# EAGLE board DAU_Kupplung_3phasig_Basisstation_V1_1 (EAGLE 6.1)
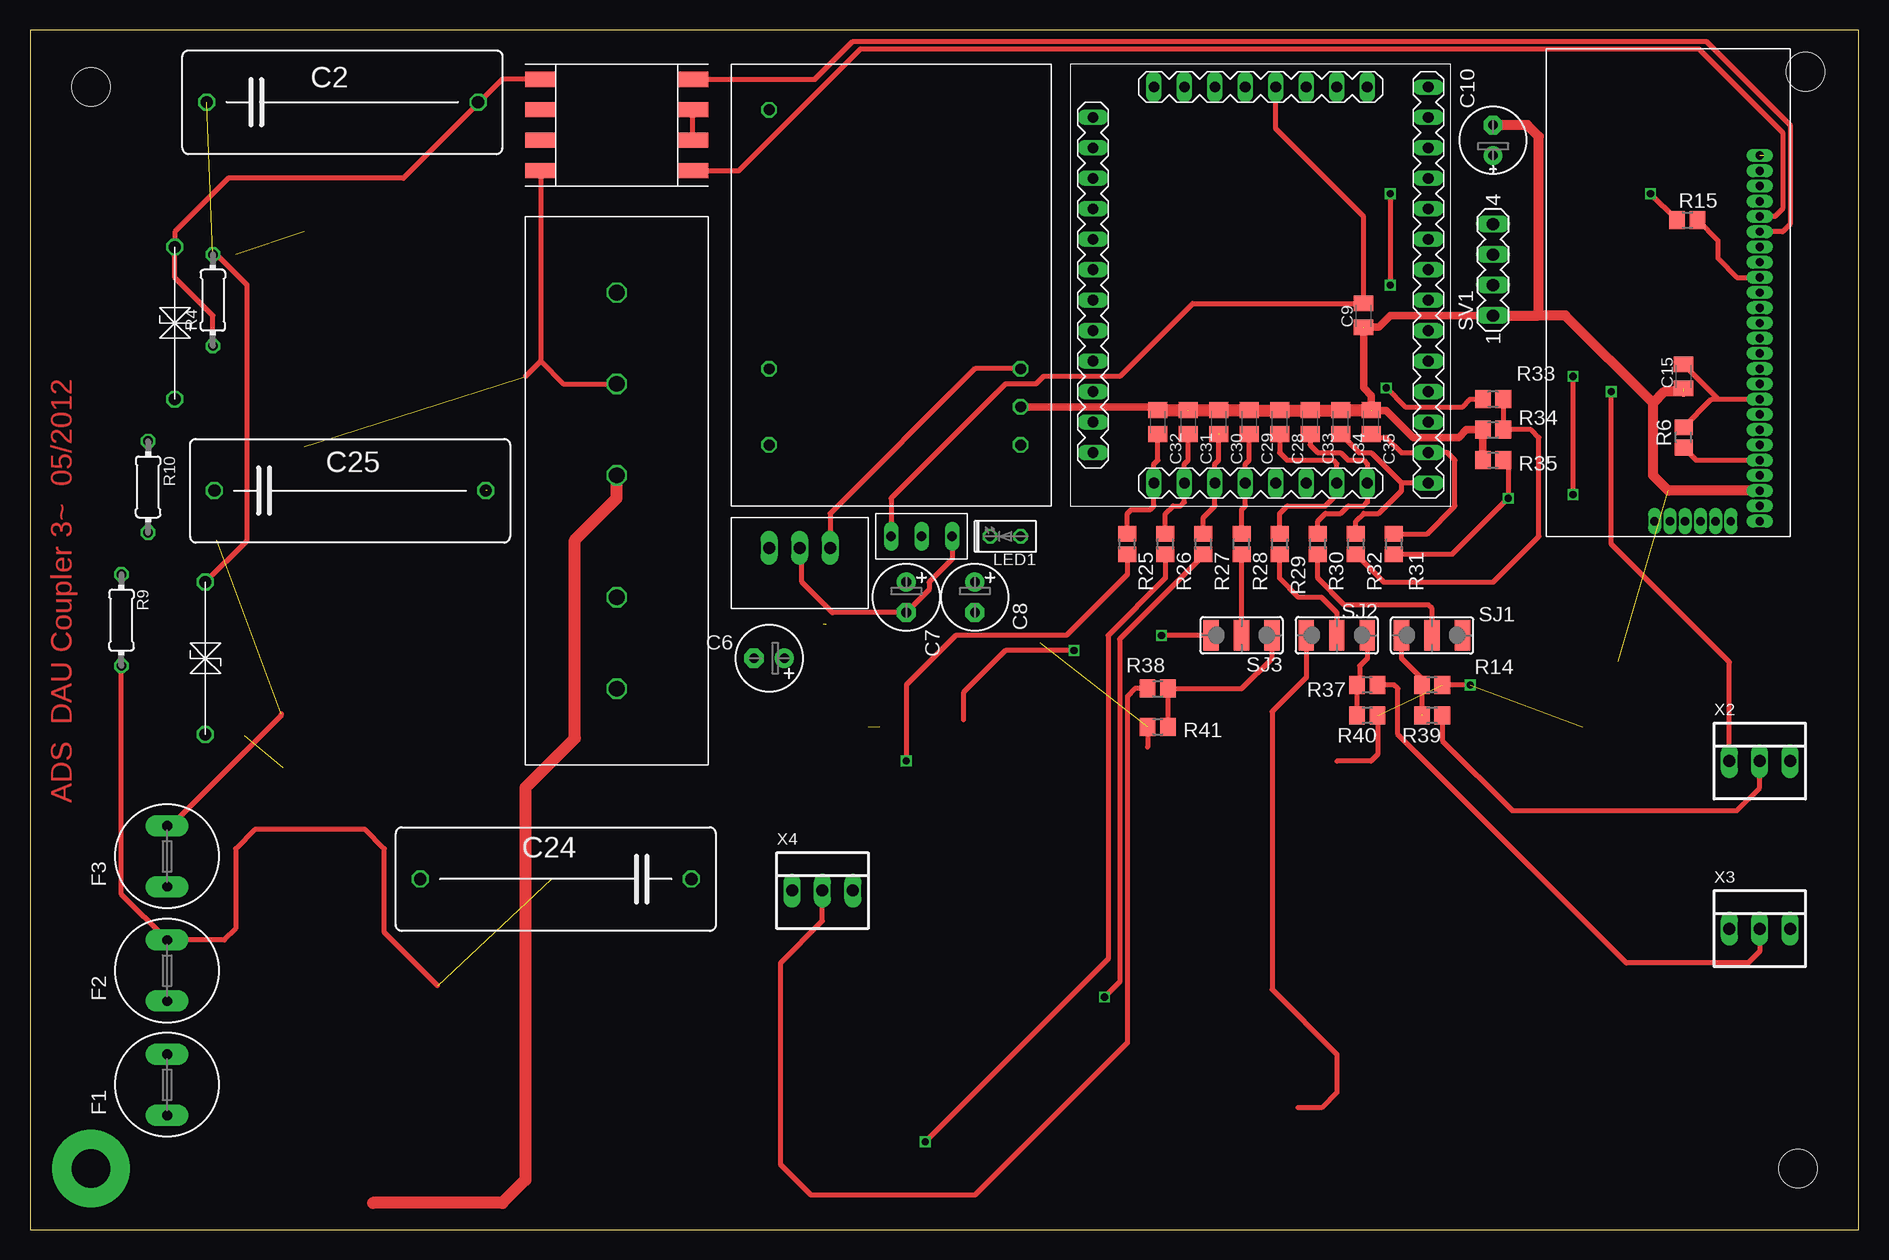
[diagram p0: board, top side]
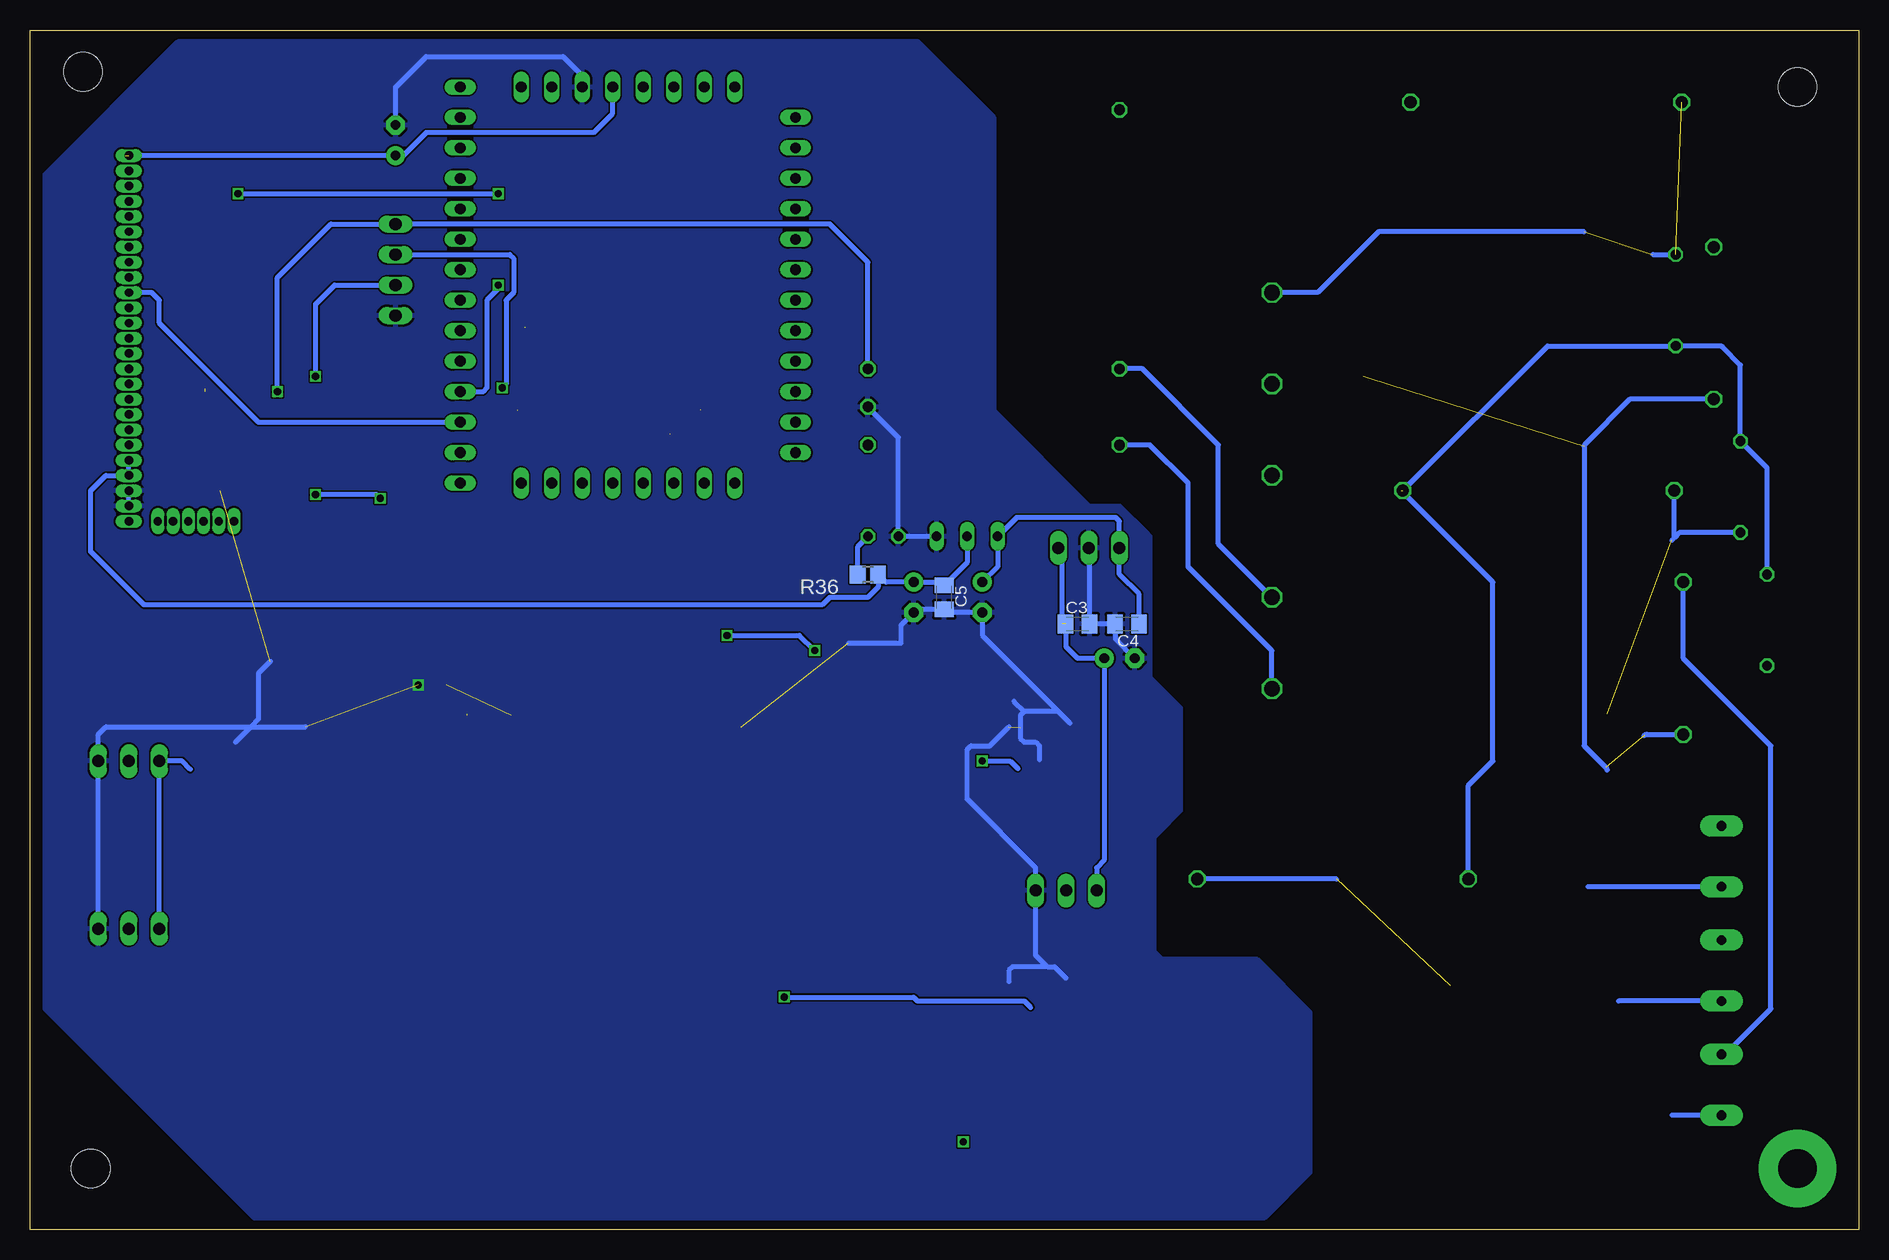
[diagram p1: board, bottom side, seen from below]

Size 152.38 x 100 mm. Coordinates in mm from the lower left corner, seen from the top.
Outline: 0,0 152.38,0 152.38,100 0,100 0,0
Copper layers (1*16): Top 0.035mm / dielectric 1.5mm / Bottom 0.035mm
Design rules: minimum track width 0.15mm, minimum drill 0.3mm, track to track 0.15mm, track to pad 0.15mm, pad to pad 0.15mm, via to via 0.15mm, smd to smd 0.15mm, copper to edge 0.3mm, drill to drill 0.2mm, minimum pad ring 0.2mm, minimum via ring 0.15mm, stop-mask expansion 0.075mm, vias tented up to drill 0mil, thermal gap 0.2mm
Holes 3.2 mm at 147.96,96.52 147.32,5.08 5.08,95.25

## Footprints (pad centres in the part's own frame; a part is rotated, then mirrored left to right if it is on the bottom)
C225-087X268 = drill 1.016 octagon: 1 -11.303,0; 2 11.303,0
C0805K = smd 1.3 x 1.6: 1 -1,0; 2 1,0
E2,5-6 = drill 0.813 pad 1.6: + -1.27,0 | drill 0.813 pad 1.6 octagon: - 1.27,0
E2,5-6E = drill 0.813 pad 1.575: + -1.27,0 | drill 0.813 pad 1.575 octagon: - 1.27,0
TR5 = drill 0.813 pad 1.778 long: 1 -2.54,0; 2 2.54,0
LED2X5 = drill 0.813 octagon: A -1.27,0; K 1.27,0
TSV = drill 1 octagon: P$1 -5.08,0; P$2 7.62,0
0204/7 = drill 0.813 octagon: 1 -3.81,0; 2 3.81,0
R0805 = smd 1.3 x 1.5: 1 -0.85,0; 2 0.85,0
SJ_2W = smd 1.27 x 2.54: 1 -2.54,0; 2 0,0; 3 2.54,0
MA04-1 = drill 1.016 long: 1 -3.81,0; 2 -1.27,0; 3 1.27,0; 4 3.81,0
RAC04_12SA = drill 0.9 octagon: +VO 25.4,24.13; GND 28.575,24.13; L 31.75,3.175; N 25.4,3.175; NC 3.81,3.175; NC1 31.75,24.13
ADUC_MINIMUM = drill 0.9 long: ADC0 -9.207,-16.51; ADC1 -6.668,-16.51; ADC2 -4.128,-16.51; ADC3 -1.587,-16.51; ADC4 6.032,-16.51; ADC5 8.572,-16.51; ADC6 13.652,-16.51; ADC7 13.652,-13.97; ALE -14.287,6.35; DAC0 0.953,-16.51; DAC1 3.493,-16.51; GND 3.493,16.51; GND2 -4.128,16.51; GND3 -6.668,16.51; INT0 13.652,-6.35; MISO 13.652,-3.81; MOSI 13.652,11.43; P00 -14.287,3.81; P01 -14.287,1.27; P02 -14.287,-1.27; P03 -14.287,-3.81; P04 -14.287,-6.35; P05 -14.287,-8.89; P06 -14.287,-11.43; P07 -14.287,-13.97; P20 13.652,13.97; P21 13.652,16.51; P22 8.572,16.51; P23 6.032,16.51; P24 -9.207,16.51; P25 -14.287,13.97; P34 13.652,-1.27; P35 13.652,1.27; P36 13.652,3.81; P37 13.652,6.35; PWM0 -14.287,11.43; PWM1 -14.287,8.89; RXD 13.652,-11.43; SCLOCK 13.652,8.89; TXD 13.652,-8.89; VCC 0.953,16.51; VCC1 -1.587,16.51
MODEM_FUSS = drill 0.7 pad 0.813 long: P$1 -20.32,-8.89; P$2 -19.05,-8.89; P$3 -17.78,-8.89; P$4 -16.51,-8.89; P$5 -15.24,-8.89; P$6 -13.97,-8.89; P$7 -12.7,-8.89; P$8 -11.43,-8.89; P$9 -10.16,-8.89; P$10 -8.89,-8.89; P$11 -7.62,-8.89; P$12 -6.35,-8.89; P$13 -5.08,-8.89; P$14 -3.81,-8.89; P$15 -2.54,-8.89; P$16 -1.27,-8.89; P$17 0,-8.89; P$18 1.27,-8.89; P$19 2.54,-8.89; P$20 3.81,-8.89; P$21 5.08,-8.89; P$22 6.35,-8.89; P$23 7.62,-8.89; P$24 8.89,-8.89; P$25 10.16,-8.89; P$29 -20.32,-3.937; P$30 -20.32,-5.207; P$31 -20.32,-6.477 | drill 0.7 pad 0.61 long: P$26 -20.32,-0.127; P$27 -20.32,-1.397; P$28 -20.32,-2.667
PLC-UEBERTRAGER_V2 = smd 2.54 x 1.27: 1LINE1 6.35,3.81; 2 6.35,1.27; 3 6.35,-1.27; 4LINE2 6.35,-3.81; 6NC -6.35,1.27; 7NC -6.35,-1.27; 8N -6.35,-3.81; L5 -6.35,3.81
RECOM785X = drill 1 long: GND 0,2.54; VIN -2.54,2.54; VOUT 2.54,2.54
TS1084_HOCH = drill 0.8 long: GND 0,0; IN 5.08,0; OUT 2.54,0
NETZFILTER = drill 1.3 octagon: L 6.35,7.62; L' 39.37,7.62; N 13.97,7.62; N' 31.75,7.62; PE 21.59,7.62
22-23-2031 = drill 1 long: 1 -2.54,0; 2 0,0; 3 2.54,0

## Placement (x,y rotation side)
C2  470n/270V  [C225-087X268]  26.04,93.98 0 top
C3  100n  [C0805K]  65.09,50.48 0 bottom
C4  100n  [C0805K]  60.96,50.48 180 bottom
C5  100n  [C0805K]  76.2,52.7 270 bottom
C6  4,7µ  [E2,5-6]  61.59,47.62 180 top
C7  4,7µ  [E2,5-6]  73.03,52.7 270 top
C8  4,7µ  [E2,5-6]  78.74,52.7 270 top
C9  100n  [C0805K]  111.12,76.2 90 top
C10  4µ7  [E2,5-6E]  121.92,90.81 90 top
C15  1µ  [C0805K]  137.79,71.12 90 top
C24  470n/270V  [C225-087X268]  43.81,29.21 180 top
C25  470n/270V  [C225-087X268]  26.67,61.59 0 top
C28  100n  [C0805K]  104.14,67.31 90 top
C29  100n  [C0805K]  101.6,67.31 90 top
C30  100n  [C0805K]  99.06,67.31 90 top
C31  100n  [C0805K]  96.52,67.31 90 top
C32  100n  [C0805K]  93.98,67.31 90 top
C33  100n  [C0805K]  106.68,67.31 90 top
C34  100n  [C0805K]  109.22,67.31 90 top
C35  100n  [C0805K]  111.76,67.31 90 top
F1  T250mA/240V  [TR5]  11.43,12.06 90 top
F2  T250mA/240V  [TR5]  11.43,21.59 90 top
F3  T250mA/240V  [TR5]  11.43,31.11 90 top
LED1  [LED2X5]  81.28,57.78 180 top
P6KE300CA  P6KE300CA  [TSV]  14.61,48.9 270 top
R4  470k  [0204/7]  15.24,77.47 90 top
R6  1M  [R0805]  137.79,66.04 90 top
R9  470k  [0204/7]  7.62,50.8 270 top
R10  470k  [0204/7]  9.84,61.91 270 top
R14  220R/33k  [R0805]  116.84,45.4 180 top
R15  330R  [R0805]  138.11,84.14 0 top
R25  10R  [R0805]  91.44,57.15 90 top
R26  10R  [R0805]  94.61,57.15 90 top
R27  10R  [R0805]  97.79,57.15 90 top
R28  10R  [R0805]  100.97,57.15 90 top
R29  10R  [R0805]  104.14,57.15 90 top
R30  10R  [R0805]  107.31,57.15 90 top
R31  10R  [R0805]  113.67,57.15 90 top
R32  10R  [R0805]  110.49,57.15 90 top
R33  680k  [R0805]  121.92,69.22 180 top
R34  470k  [R0805]  121.92,66.67 0 top
R35  220R  [R0805]  121.92,64.14 0 top
R36  330R  [R0805]  82.55,54.61 180 bottom
R37  0/82k  [R0805]  111.44,45.4 180 top
R38  0/82k  [R0805]  93.98,45.09 0 top
R39  0/82k  [R0805]  116.84,42.86 180 top
R40  220R/33k  [R0805]  111.44,42.86 180 top
R41  220R/33k  [R0805]  93.98,41.91 0 top
SJ1  [SJ_2W]  116.84,49.53 0 top
SJ2  [SJ_2W]  108.9,49.53 180 top
SJ3  [SJ_2W]  100.97,49.53 180 top
SV1  [MA04-1]  121.92,80.01 90 top
TSV2  TSV  [TSV]  12.06,76.83 270 top
U$1  RECOM_RAC04_12SA  [RAC04_12SA]  58.42,97.16 270 top
U$3  ADUC831_MINIMUM  [ADUC_MINIMUM]  102.87,78.74 0 top
U$4  MODEMSTECKER  [MODEM_FUSS]  135.25,79.38 90 top
U$5  PLC_UEBERTRAGER_V2  [PLC-UEBERTRAGER_V2]  48.9,92.08 0 top
U$10  RECOM_785_05  [RECOM785X]  64.14,59.37 180 top
U$11  TS1084_HOCH  [TS1084_HOCH]  76.83,57.78 180 top
U$20  NETZFILTER_05_A  [NETZFILTER]  41.27,84.45 270 top
X2  22-23-2031  [22-23-2031]  144.15,39.05 0 top
X3  22-23-2031  [22-23-2031]  144.15,25.08 0 top
X4  22-23-2031  [22-23-2031]  66.04,28.26 0 top

## Library data of the parts
C2-C9 C15 C24 C25 C28-C35 R4 R6 R9 R10 R14 R15 R25-R41 = resistor
C10 = rcl
F1-F3 = fuse; OC_FARNELL: unknown; OC_NEWARK: unknown
LED1 = led
P6KE300CA TSV2 U$1 U$4 U$10 U$11 U$20 = ADS
SJ1-SJ3 = jumper
SV1 = con-lstb; OC_FARNELL: unknown; OC_NEWARK: unknown
U$3 = ADS_ADUCBoards
U$5 = ADS1
X2-X4 = con-molex; MF: MOLEX; MPN: 22-23-2031; OC_FARNELL: 1462950; OC_NEWARK: 30C0862

## Nets
+3V3: C5.1 C8.+ R6.1 R36.1 U$4.P$4 U$4.P$5 U$11.OUT
+5V: C4.1 C7.+ C9.2 C10.+ U$3.VCC U$4.P$25 U$10.VOUT U$11.IN
+12V: C3.1 C6.+ SV1.4 U$1.+VO U$10.VIN X2.1 X3.1 X4.1
ADC0: C32.1 R25.2 U$3.ADC0
ADC1: C31.1 R26.2 U$3.ADC1
ADC2: C30.1 R27.2 U$3.ADC2
ADC3: C29.1 R28.2 U$3.ADC3
ADC4: C28.1 R29.2 U$3.ADC4
ADC5: C33.1 R30.2 U$3.ADC5
GND: C3.2 C4.2 C5.2 C6.- C7.- C8.- C9.1 C10.- C15.1 C28.2 C29.2 C30.2 C31.2 C32.2 C33.2 C34.2 C35.2 LED1.K R14.1 R34.1 R35.1 R40.1 R41.1 SV1.1 U$1.GND U$3.GND U$4.P$2 U$4.P$3 U$10.GND U$11.GND X2.3 X3.3 X4.3
I1: R28.1 SJ3.2
I1INTERN: SJ3.3
I2: R29.1 SJ2.2
I2INTERN: SJ2.3
I3: R30.1 SJ1.2
L1: C2.1 F1.2 P6KE300CA.P$1 R4.2 U$20.L
L2: C24.1 F2.2 R9.2
L3: C25.1 F3.2 R10.2
N: P6KE300CA.P$2 TSV2.P$2 U$5.8N U$20.N
N$1: R15.2 U$4.P$17
N$5: U$4.P$20 U$5.1LINE1
N$8: C35.1 R31.2 U$3.ADC7
N$13: U$4.P$21 U$5.4LINE2
N$14: R15.1 U$3.TXD
N$15: U$3.RXD U$4.P$16
N$16: U$1.L U$20.L'
N$19: LED1.A R36.2
N$20: C15.2 R6.2 U$4.P$9
N$25: C34.1 R32.2 U$3.ADC6
N$26: C2.2 C24.2 C25.2 R4.1 R9.1 R10.1 TSV2.P$1 U$5.L5
N$33: U$5.2 U$5.3
N$37: R33.2 SV1.3
N$41: U$1.N U$20.N'
N$42: R37.2 R40.2 SJ2.1
N$43: R37.1 X3.2
N$45: R14.2 R39.2 SJ1.1
N$46: F1.1
N$47: F2.1
N$48: F3.1
N$49: R32.1 R33.1 R34.2
N$50: R31.1 R35.2 SV1.2
N$53: R39.1 X2.2
N$54: R38.2 R41.2 SJ3.1
N$55: R38.1 X4.2
PE: U$20.PE
U1: R25.1
U2: R26.1
U3: R27.1

## Tracks (layer width: path | path; a pad name or v marks a point on that pad's centre or on a via)
+3V3
  Top 0.406: R6.1 138.85,64.14 U$4.P$5
  Bottom 0.406: U$11.OUT 74.3,55.61 C5.1 76.47,53.98 C8.+ 81.06,53.98 R36.1 81.7,53.55 82.55,52.7 85.72,52.7 86.36,52.07 142.88,52.07 147.32,56.52 147.32,61.59 146.05,62.87 U$4.P$4 U$4.P$5
+5V  (1 unrouted)
  Top 0.406: U$11.IN 71.75,60.96 81.28,70.48 83.82,70.48 84.45,71.12 90.81,71.12 96.89,77.2 C9.2 | C9.2 111.12,84.45 103.82,91.76 U$3.VCC | C9.2 111.12,77.15
  Bottom 0.406: C4.1 59.96,52.98 61.59,54.61 U$10.VOUT 61.59,59.05 61.91,59.37 70.17,59.37 U$11.IN 71.75,55.24 C7.+ | U$3.VCC 103.82,93.03 105.41,91.44 119.38,91.44 121.28,89.53 C10.+ 144.46,89.53
+12V  (via drill 0.6)  (1 unrouted)
  Top 0.406: U$1.+VO 78.74,71.75 66.67,59.69 U$10.VIN | X2.1 141.6,47.31 131.76,57.15 v131.76,69.85
  Bottom 0.406: U$10.VIN 66.41,56.24 66.41,50.53 66.36,50.48 | U$1.+VO 82.55,80.64 85.72,83.82 SV1.4 127.32,83.82 131.76,79.38 v131.76,69.85 | C3.1 66.04,50.44 66.04,48.58 65.09,47.62 C6.+ 62.87,30.8 63.5,30.16 X4.1 | X3.1 X2.1 139.7,39.05 139.02,38.37
ADC0
  Top 0.406: R25.2 91.44,59.69 91.76,60.01 93.34,60.01 93.66,60.33 U$3.ADC0 93.66,63.82 93.98,64.14 C32.1
ADC1
  Top 0.406: R26.2 94.61,59.69 95.25,60.33 95.89,60.33 96.2,60.64 U$3.ADC1 96.2,63.82 96.52,64.14 C31.1
ADC2  (1 unrouted)
  Top 0.406: R27.2 97.79,59.37 98.74,60.33 U$3.ADC2 98.74,63.82 99.06,64.14 99.06,66.36
ADC3
  Top 0.406: R28.2 100.97,60.01 101.28,60.33 U$3.ADC3 101.28,63.82 101.6,64.14 C29.1
ADC4
  Top 0.406: C28.1 104.14,64.77 104.78,64.14 108.58,64.14 108.9,63.82 U$3.ADC4 108.9,61.28 107.95,60.33 104.78,60.33 104.14,59.69 R29.2
ADC5
  Top 0.406: C33.1 106.68,65.41 107.31,64.77 109.22,64.77 109.86,64.14 111.12,64.14 111.44,63.82 U$3.ADC5 111.44,60.64 111.12,60.33 109.86,60.33 109.22,59.69 107.95,59.69 107.31,59.05 R30.2
GND  (via drill 0.6)  (9 unrouted)
  Top 0.406: U$10.GND 64.31,56.34 64.31,53.99 66.87,51.44 C7.- 74.93,53.34 74.93,53.98 76.83,55.88 U$11.GND | C32.2 93.71,68.58 | C15.1 137.43,70.48 | R41.1 93.13,40.22 | v120.02,45.4 R14.1 | R40.1 112.29,39.59 111.76,39.05 108.9,39.05
  Top 0.61: 93.71,68.58 U$1.GND | R34.1 120.97,66.67 | 120.97,66.67 119.7,66.67 119.06,66.04 115.25,66.04 113.03,68.26 111.76,68.26 111.76,69.53 111.12,70.17 111.12,75.25 112.39,75.25 113.35,76.2 SV1.1 | R35.1 121.07,66.57 120.97,66.67
  Top 0.813: U$4.P$3 136.53,61.59 135.25,62.87 135.25,68.9 | 137.79,69.85 136.21,69.85 135.25,68.9 | 135.25,68.9 127.95,76.2 125.73,76.2 | 121.6,76.2 SV1.1 125.73,76.2 | 125.73,76.2 125.73,91.12 124.78,92.08 C10.-
  Top 1.016: C32.2 96.47,68.31 96.52,68.26 | C31.2 C30.2 C29.2 101.6,68.26 104.09,68.26 C28.2 104.14,68.26 106.63,68.26 C33.2 106.68,68.26 109.17,68.26 C34.2 C35.2
  Bottom 0.254: 69.85,40.96 69.85,41.86
  Bottom 0.406: C10.- 121.92,95.25 119.38,97.79 107.95,97.79 106.36,96.2 U$3.GND | U$4.P$2 U$4.P$3 | U$11.GND LED1.K 80.01,66.04 U$1.GND | 135.25,40.64 133.99,41.91 | 133.99,41.91 129.41,41.91 | 132.35,47.35 133.35,46.35 133.35,42.55 133.99,41.91 | 84.19,48.9 79.8,48.9 79.8,50.38 C8.- 78.47,51.7 C5.2 75.93,51.44 C7.- 73.03,49.53 66.67,43.18 | 67.63,21.91 70.48,21.91 70.8,21.59 70.8,20.68 | 67.63,21.91 68.58,22.86 X4.3 68.58,30.16 74.3,35.88 74.3,40.01 73.98,40.32 72.39,40.32 70.8,41.91 | 65.72,42.23 66.67,43.18 | 66.67,43.18 69.53,43.18 | 69.53,43.18 69.85,42.86 69.85,40.96 69.53,40.64 68.58,40.64 68.26,40.32 68.26,39.16 | 70.38,44.03 69.53,43.18 | X3.3 X2.3 146.69,41.27 146.05,41.91 133.99,41.91 | C6.- 61.91,49.21 61.91,50.44 C4.2 C3.2 64.09,56.78 U$10.GND | 67.63,21.91 66.99,21.91 66.04,20.95
  pour Bottom: 45.72,16.51 45.72,4.76 49.53,0.95 133.67,0.95 151.13,18.41 151.13,87.95 140.02,99.06 78.42,99.06 72.07,92.71 72.07,68.26 64.14,60.33 61.59,60.33 59.37,58.1 59.05,57.78 59.05,46.04 56.52,43.5 56.52,34.92 58.42,33.02 58.74,32.7 58.74,23.18 58.1,22.54 50.16,22.54 45.72,18.1
I1
  Top 0.406: SJ3.2 R28.1
I1INTERN  (via drill 0.6)
  Top 0.406: SJ3.3 v94.3,49.53 | v87,48.26 81.28,48.26 77.79,44.77 77.79,42.48
  Bottom 0.406: v94.3,49.53 88.27,49.53 v87,48.26
I2
  Top 0.406: R29.1 104.14,54.29 105.73,52.7 107.63,52.7 108.9,51.44 SJ2.2
I2INTERN
  Top 0.406: SJ2.3 106.36,46.04 103.5,43.18 103.5,20 108.9,14.61 108.9,11.43 107.63,10.16 105.66,10.16
I3
  Top 0.406: SJ1.2 116.84,51.75 116.52,52.07 109.54,52.07 107.31,54.29 R30.1
L1  (2 unrouted)
  Top 0.406: P6KE300CA.P$1 18,57.38 arc45 18.1,57.6 18.1,78.74 15.65,81.19 arc45 15.43,81.28 R4.2
  Bottom 0.406: 17.14,81.28 R4.2 | 22.86,83.19 40.01,83.19 45.09,78.11 U$20.L | F1.2 11.11,14.61 7.3,18.41 7.3,40.32 14.61,47.62 P6KE300CA.P$1
L2  (1 unrouted)
  Top 0.406: R9.2 7.62,27.94 F2.2 16.19,24.13 17.14,25.08 17.14,31.75 18.73,33.34 27.94,33.34 29.53,31.75 29.53,24.77 33.97,20.32
  Bottom 0.406: 43.5,29.21 C24.1
L3  (1 unrouted)
  Top 0.406: 20.95,42.99 arc-45 20.86,42.77 11.75,33.66 F3.2
  Bottom 0.406: 15.56,57.47 15.37,57.66 | 15.37,57.66 C25.1 | R10.2 14.92,58.1 15.37,57.66
N  (2 unrouted)
  Top 0.406: U$5.8N 42.55,72.39 | 42.55,72.39 44.45,70.48 U$20.N | 41.27,71.12 42.55,72.39
  Bottom 0.406: TSV2.P$2 19.05,69.22 22.77,65.5 arc-45 22.86,65.27 22.86,40.32 21.05,38.51 arc45 20.95,38.29 | 17.87,41.18 arc45 17.65,41.27 P6KE300CA.P$2
N$1
  Top 0.406: R15.2 140.65,82.45 140.65,80.96 142.24,79.38 U$4.P$17
N$5
  Top 0.406: U$5.1LINE1 65.41,95.89 68.58,99.06 139.7,99.06 146.69,92.08 146.69,83.82 146.05,83.19 U$4.P$20
N$8
  Top 0.406: C35.1 112.03,66.04 113.03,66.04 114.3,64.77 U$3.ADC7 118.11,64.77 118.75,64.14 118.75,60.33 116.42,58 R31.2
N$13
  Top 0.406: U$5.4LINE2 59.05,88.27 69.22,98.42 139.06,98.42 146.05,91.44 146.05,85.09 145.41,84.45 U$4.P$21
N$14  (via drill 0.6)
  Top 0.406: R15.1 v135.04,86.36 | v113.35,86.36 v113.35,78.74
  Bottom 0.406: v113.35,78.74 113.35,78.42 114.3,77.47 114.3,70.17 114.62,69.85 U$3.TXD | v135.04,86.36 v113.35,86.36
N$15
  Bottom 0.406: U$4.P$16 142.24,78.11 141.6,77.47 141.6,75.56 133.35,67.31 U$3.RXD
N$16
  Bottom 0.406: U$20.L' 48.9,48.26 55.88,55.24 55.88,62.23 59.05,65.41 U$1.L
N$19
  Bottom 0.406: R36.2 83.4,56.94 LED1.A
N$20
  Top 0.406: C15.2 140.7,69.22 | 140.7,69.22 U$4.P$9 | R6.2 140.12,69.22 140.7,69.22
N$25
  Top 0.406: C34.1 110.76,64.77 111.76,64.77 114.14,62.39 114.3,62.23 | R32.2 110.49,59.05 111.12,59.69 112.39,59.69 114.3,61.59 114.3,62.23 | U$3.ADC6 114.3,62.23
N$26  (1 unrouted)
  Top 0.254: C2.2 37.47,93.98 39.37,95.89
  Top 0.406: U$5.L5 39.37,95.89 31.11,87.63 16.51,87.63 12.06,83.19 TSV2.P$1 12.06,79.38 15.24,76.2 R4.1
  Bottom 0.406: 37.47,61.59 C25.2 25.91,73.66 R4.1 11.56,73.66 arc45 11.34,73.57 9.84,72.07 R10.1 7.62,63.5 R9.1 | C24.2 32.51,37.02 30.48,39.05 30.48,53.98 38.1,61.59
N$33
  Top 0.406: U$5.3 U$5.2
N$37  (via drill 0.6)
  Top 0.406: v113.03,70.17 114.62,68.58 119.38,68.58 120.02,69.22 R33.2
  Bottom 0.406: SV1.3 112.39,81.28 112.08,80.96 112.08,78.11 112.71,77.47 112.71,70.48 v113.03,70.17
N$41
  Bottom 0.406: U$20.N' 53.34,57.15 53.34,65.41 59.69,71.75 U$1.N
N$42
  Top 0.406: R40.2 R37.2 110.81,45.62 110.81,46.99 111.44,47.62 SJ2.1
N$43
  Top 0.406: X3.2 144.15,23.18 143.19,22.23 133.03,22.23 113.98,41.27 113.98,45.09 113.67,45.4 R37.1
N$45  (1 unrouted)
  Top 0.406: SJ1.1 114.3,47.62 115.99,45.94 R14.2 115.99,42.97 115.89,42.86
N$46
  Bottom 0.406: F1.1 15.56,9.53
N$47
  Bottom 0.406: F2.1 20,19.05
N$48
  Bottom 0.406: F3.1 22.54,28.57
N$49
  Top 0.406: R32.1 112.81,53.98 121.92,53.98 125.73,57.78 125.73,66.04 125.09,66.67 R34.2 R33.1
N$50  (via drill 0.6)
  Top 0.406: R31.1 118.53,56.3 v123.19,60.96 123.19,63.72 R35.2 | v128.59,61.28 v128.59,71.12
  Bottom 0.406: v123.19,60.96 123.51,61.28 v128.59,61.28 | v128.59,71.12 128.59,77.15 127,78.74 SV1.2
N$52  (via drill 3.2 pad 6.45)
  other vias: 5.08,5.08
N$53
  Top 0.406: R39.1 117.69,40.74 123.51,34.92 142.24,34.92 144.15,36.83 X2.2
N$54
  Top 0.406: SJ3.1 103.5,47.62 100.97,45.09 R38.2 R41.2
N$55
  Top 0.406: R38.1 92.08,45.09 91.44,44.45 91.44,15.56 78.74,2.86 65.09,2.86 62.55,5.4 62.55,22.23 66.04,25.72 X4.2
PE
  Top 1.016: U$20.PE 48.9,60.96 45.4,57.47 45.4,40.96 41.27,36.83 41.27,4.13 39.37,2.22 28.57,2.22
U1  (via drill 0.6)
  Top 0.406: R25.1 91.44,54.61 86.36,49.53 77.15,49.53 73.03,45.4 v73.03,39.05
  Bottom 0.406: v73.03,39.05 70.7,39.05 70.06,38.42
U2  (via drill 0.6)
  Top 0.406: R26.1 94.61,54.29 89.85,49.53 89.85,22.54 v74.61,7.3
U3  (via drill 0.6)
  Top 0.406: R27.1 97.79,56.2 90.81,49.21 90.81,20.64 v89.53,19.37
  Bottom 0.406: 69,18.52 69.53,19.05 78.42,19.05 78.74,19.37 v89.53,19.37

## Text on the board
Top: ADS DAU Coupler 3~ 05/2012